# Altium PCB PCB1.PcbDoc (part 3 of 3)
Units mm, origin at the board's own origin, x right, y up, seen from the top; angles counter-clockwise.
Board outline 100.84 x 68.96 mm, 2 copper layers (Top Layer, Bottom Layer); 67 components, 62 nets, 324 pads, 94 vias.
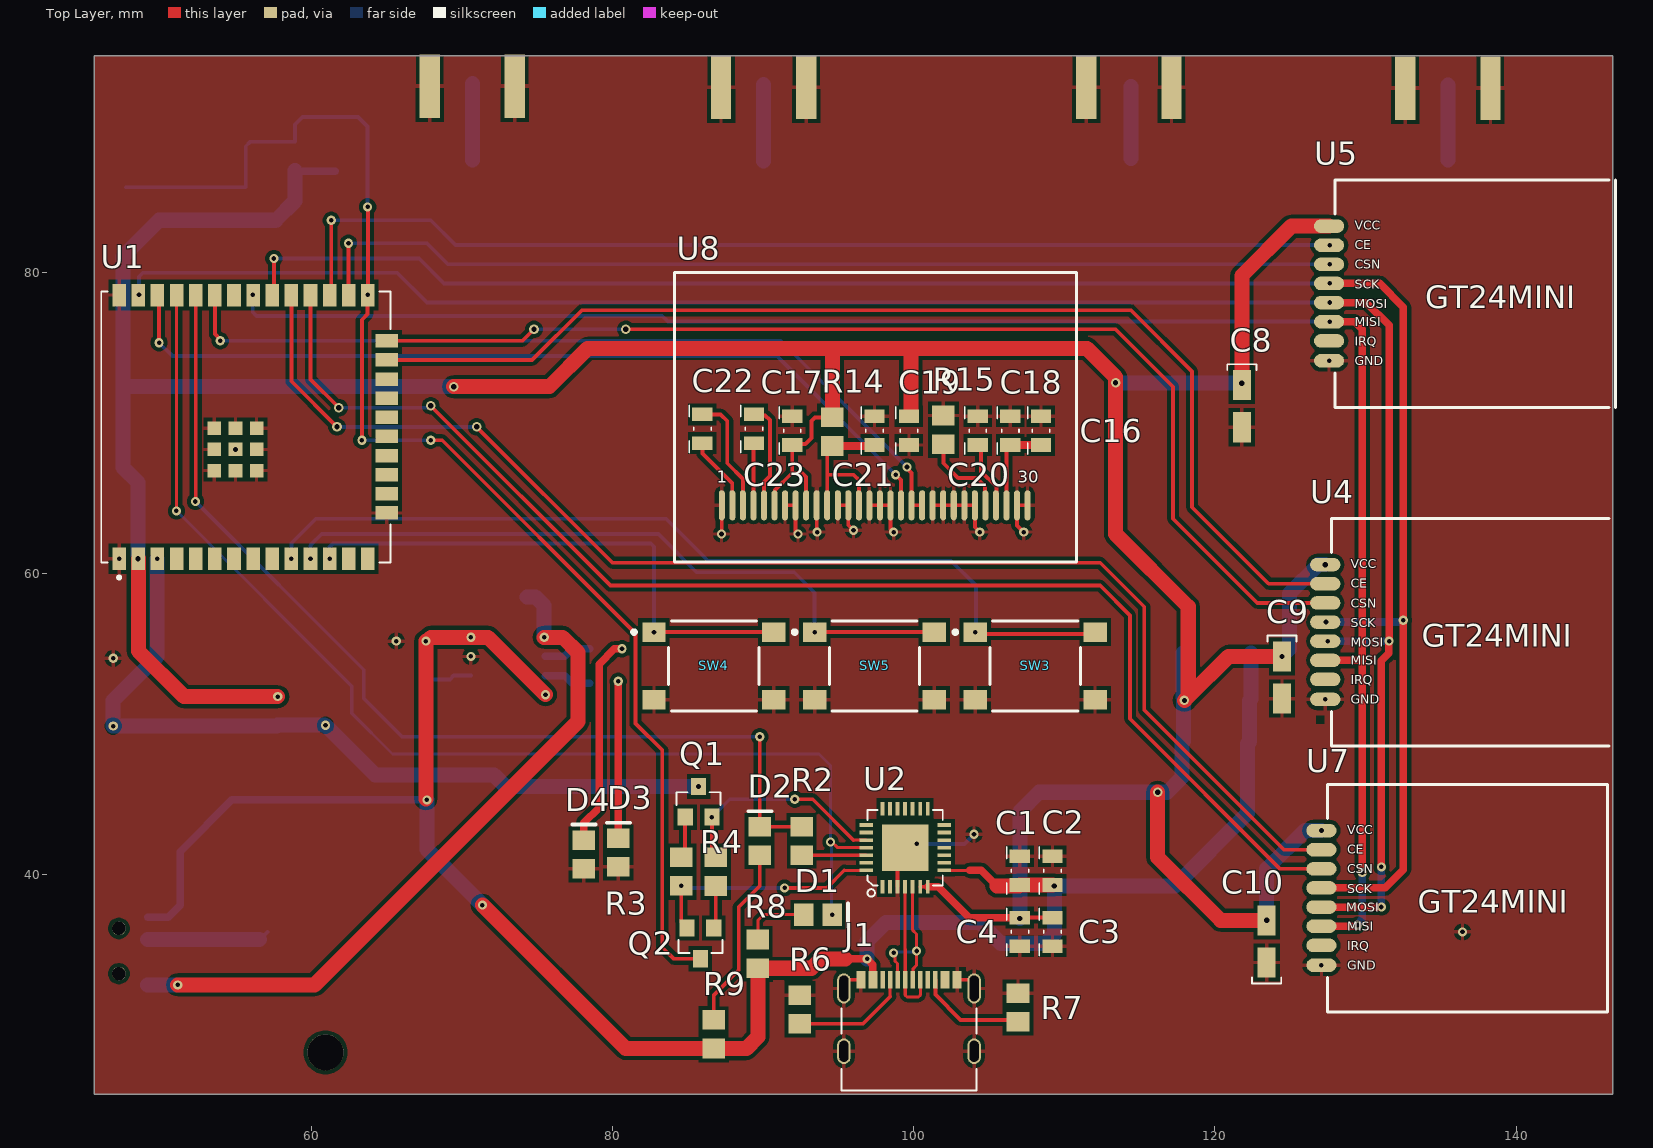
[diagram p0: Top Layer view]

## Via types
v1: diameter 0.61, hole 0.305, Top Layer to Bottom Layer, 76 vias
v2: diameter 0.635, hole 0.354, Top Layer to Bottom Layer, 18 vias

## Nets (pads, with @x,y where several pads share a name; then routed paths per layer and width w, separated by ;. In a path a pad name is that pad's centre, name@x,y a point inside that pad or via, vN(x,y) a via of type N, cw(c..) or ccw(c..) an arc to the next point about the centre after c; other vN are vias at no path point) (continued)
IO18: (continued)
  Bottom Layer w0.254: v1(57.531,80.899) 67.183,80.899 68.834,79.248 v1(127.635,79.248)
  Bottom Layer w0.5: v1(127.381,56.769) 132.371,56.769 132.482,56.88 v1(132.512,56.88)
IO19: U1.31 U4.6 U5.6 U7.6 | length 120
  Top Layer w0.254: U7.6 U7.6@127.082,36.574 ; v1@129.411,36.574 v1(129.476,36.639) ; 129.645,54.224 129.794,54.373
  Top Layer w0.5: U7.6@127.082,36.574 v1@129.411,36.574 ; U4.6 129.645,54.224 ; U5.6 129.291,76.703 129.794,76.2 129.794,54.373 v1(129.794,40.132)
  Bottom Layer w0.254: v1(56.134,78.486) 56.134,77.343 56.388,77.089 83.312,77.089 83.693,76.708 v1(127.635,76.708) ; v1(129.476,36.639) v1@129.476,36.736
  Bottom Layer w0.5: v1@129.476,36.736 129.794,37.053 v1(129.794,40.132)
IO21: U1.33 U8.19 U8.20 | length 55.6
  Top Layer w0.254: U1.33 53.614,75.895 53.975,75.534 v1(53.975,75.438) ; v1(99.568,67.056) 99.568,66.96 99.869,66.659 U8.19 U8.20
  Bottom Layer w0.254: v1(53.975,75.438) 91.186,75.438 v1(99.568,67.056)
IO22: U1.36 U8.18 | length 57.9
  Top Layer w0.254: U1.36 49.911,78.366 v1(49.911,75.311) ; v1(98.806,66.548) 99.169,66.185 U8.18
  Bottom Layer w0.254: v1(49.911,75.311) 50.8,74.422 90.932,74.422 v1(98.806,66.548)
IO23: U1.37 U4.5 U5.5 U7.5 | length 132.7
  Top Layer w0.254: U7.5 U7.5@127.082,37.844 ; v1@131.062,37.844 v1(131.064,37.846)
  Top Layer w0.5: U7.5@127.082,37.844 v1@131.062,37.844 ; U5.5 130.053,77.973 131.572,76.454 v1(131.572,55.499) 131.551,55.478 131.551,54.681 131.064,54.194 v1(131.064,40.513)
  Bottom Layer w0.254: v1(48.579,78.486) 48.579,79.694 48.844,79.959 65.71,79.959 67.691,77.978 v1(127.635,77.978)
  Bottom Layer w0.5: v1(127.508,55.499) v1(131.572,55.499) ; v1(131.064,37.846) v1(131.064,40.513)
IO25: SW3.1 SW3.2 U1.10 | length 60
  Top Layer w0.254: SW3.1@104.737,55.971 SW3.2@112.687,55.971
  Bottom Layer w0.254: v1(58.694,60.973) 58.694,61.996 60.325,63.627 83.566,63.627 86.36,60.833 102.489,60.833 104.14,59.182 104.14,56.136 v1(104.102,56.098)
IO26: SW5.1 SW5.2 U1.11 | length 46.9
  Top Layer w0.254: v1(93.434,56.098) SW5.2
  Bottom Layer w0.254: v1(59.964,60.973) 59.964,61.869 60.706,62.611 83.058,62.611 85.598,60.071 92.075,60.071 93.434,58.712 v1(93.434,56.098)
IO27: SW4.1 SW4.2 U1.12 | length 36.1
  Top Layer w0.254: v1(82.766,56.098) SW4.2
  Bottom Layer w0.254: v1(61.234,60.973) 61.234,61.742 61.468,61.976 82.55,61.976 82.766,61.76 v1(82.766,56.098)
IO32: U1.8
IO33: U1.9
IO34: U1.6
IO35: U1.7
NetANT1_1: ANT1.1 J3.1 | length 5
  Bottom Layer w0.254: ANT1.1@135.478,87.447 ANT1.1
  Bottom Layer w1: ANT1.1@135.478,87.447 J3.1
NetANT2_1: ANT2.1 J4.1 | length 5
  Bottom Layer w0.254: J4.1 J4.1@114.429,92.327
  Bottom Layer w1: ANT2.1 J4.1@114.429,92.327
NetANT3_1: ANT3.1 J5.1 | length 5.2
  Bottom Layer w0.254: ANT3.1@90.043,87.376 ANT3.1
  Bottom Layer w1: ANT3.1@90.043,87.376 J5.1
NetANT4_1: ANT4.1 J6.1 | length 5.1
  Bottom Layer w0.254: ANT4.1@70.708,87.447 ANT4.1
  Bottom Layer w1: ANT4.1@70.708,87.447 J6.1
NetBT1_P: BT1.P SW8.2 | length 8.2
  Bottom Layer w0.254: BT1.P@56.584,35.675 BT1.P
  Bottom Layer w1: SW8.2 BT1.P@56.584,35.675
NetC16_2: C16.2 C18.2 U8.28 | length 6.1
  Top Layer w0.254: U8.28 106.169,68.262 C18.2
  Top Layer w0.5: C18.2 C16.2
NetC20_1: C20.1 U8.27 | length 4.5
  Top Layer w0.254: C20.1 104.481,68.305 104.481,66.762 105.497,65.746 105.497,64.544 U8.27
NetC21_1: C21.1 R14.2 U8.11 U8.14 | length 10.8
  Top Layer w0.254: U8.11 94.269,66.548 ; R14.2 94.269,68.107 94.269,66.548 ; U8.14 96.369,66.191 96.012,66.548 94.269,66.548 ; C21.1@97.343,68.453 C21.1
  Top Layer w0.5: R14.2 C21.1@97.343,68.453
NetC22_1: C22.1 U8.2 | length 5
  Top Layer w0.254: C22.1 85.979,67.945 87.969,65.955 U8.2
NetC22_2: C22.2 U8.3 | length 7.9
  Top Layer w0.254: C22.2 87.188,70.546 87.63,70.104 87.63,67.31 88.669,66.271 U8.3
NetC23_1: C23.1 U8.4 | length 4.1
  Top Layer w0.254: U8.4 89.369,68.607 C23.1
NetC23_2: C23.2 U8.5 | length 7
  Top Layer w0.254: C23.2 89.469,70.485 90.148,70.485 90.464,70.169 90.464,66.461 90.069,66.066 U8.5
NetD1_A: D1.A R8.2 | length 4.5
  Top Layer w0.2: R8.2 89.662,36.957 90.043,37.338 D1.A
NetD2_A: D2.A R9.2 | length 12.2
  Top Layer w0.254: R9.2 86.741,32.004 88.392,33.655 88.392,37.846 89.789,39.243 D2.A
NetD3_k: D3.K R11.1 | length 10.3
  Top Layer w0.254: D3.K@80.391,42.794 D3.K@80.581,42.603
  Top Layer w0.5: D3.K@80.391,42.794 80.391,51.054 v1(80.391,52.832)
NetD4_k: D4.K R10.2 | length 14.1
  Top Layer w0.5: D4.K 78.105,43.434 79.121,44.45 79.121,49.042 79.121,53.975 80.137,54.991 v1(80.645,54.991)
NetQ1_1: Q1.1 R3.2 | length 2.8
  Top Layer w0.254: R3.2 84.836,41.402 Q1.1
NetQ2_1: Q2.1 R4.1 | length 2.8
  Top Layer w0.254: Q2.1 86.868,36.576 R4.1
NetR2_1: R2.1 U2.26 | length 4.3
  Top Layer w0.2: R2.1@92.586,41.283 U2.26
  Top Layer w0.254: R2.1 R2.1@92.586,41.283
NetR10_1: R10.1 U3.6 | length 3.1
  Bottom Layer w0.5: U3.6 76.835,54.483 77.343,54.991 R10.1
NetR11_2: R11.2 U3.7 | length 3.1
  Bottom Layer w0.5: U3.7 76.835,53.213 77.343,52.705 R11.2
NetR13_2: R13.2 U3.2 | length 3
  Bottom Layer w0.254: R13.2 69.215,52.959 69.469,53.213 U3.2
NetR15_1: R15.1 U8.26 | length 5.9
  Top Layer w0.254: R15.1 101.981,67.31 102.962,66.329 104.196,66.329 104.741,65.783 104.741,64.544 U8.26
RESET: C6.2 Q1.3 R1.1 SW1.1 SW1.2 U1.3 | length 53.4
  Bottom Layer w0.254: v1(46.863,49.856) SW1.1@46.988,49.856 ; 47.197,51.896 47.197,52.021 ; R1.1@57.725,49.856 R1.1 ; v1(60.96,49.911) C6.2@61.217,49.654
  Bottom Layer w1: v1(49.784,60.96) 49.784,54.483 47.197,51.896 46.863,51.562 v1(46.863,49.856) SW1.2 R1.1@57.725,49.856 ; R1.1 C6.2@60.899,49.916 ; v1(60.96,49.911) 64.262,46.609 72.146,46.609 72.908,45.847 v1(85.725,45.847)
RI: U2.2
RTS: Q1.2 R4.2 U2.24 | length 14.6
  Top Layer w0.2: 96.02,42.283 U2.24
  Top Layer w0.254: v1(86.614,43.815) 86.614,41.397 R4.2 ; v1(92.117,45) 93.303,45 96.02,42.283
  Bottom Layer w0.254: v1(86.614,43.815) 87.799,45 v1(92.117,45)
RX_0: D2.K R2.2 U1.34 | length 67.5
  Top Layer w0.254: v1(52.324,64.77) 52.344,64.79 U1.34 ; v1(89.789,49.149) D2.K R2.2
  Bottom Layer w0.254: v1(52.324,64.77) 63.5,53.594 63.5,51.689 66.04,49.149 v1(89.789,49.149)
TX_0: D1.K U1.35 U2.25 | length 78.3
  Top Layer w0.2: v1@51.054,64.135 v1(51.064,64.145) 51.074,64.155 U1.35 ; v1(94.488,42.164) 94.581,42.164 94.962,41.783 U2.25
  Bottom Layer w0.2: v1(51.064,64.145) 62.703,52.506 62.703,50.708 65.405,48.006 93.726,48.006 94.488,47.244 v1(94.488,42.164) 94.549,42.103 94.549,37.399 v1(94.61,37.338)
pads on no net: BT1. J1.A8 J1.B4_A9 J1.B8 SW8. SW8.EP U1.4 U1.5 U1.17 U1.18 U1.19 U1.20 U1.21 U1.22 U1.32 U1.40_1 U1.40_2 U1.40_3 U1.40_4 U1.40_5 U1.40_6 U1.40_7 U1.40_8 U1.40_9 U1.40_10 U1.40_11 U1.40_12 U2.9 U2.10 U2.11 U2.12 U2.13 U2.14 U2.15 U2.16 U2.17 U2.18 U2.19 U2.20 U2.21 U2.22 U3.1 U3.9 U4.7 U5.7 U7.7

## Polygon pours and split planes (outlines as drawn)
GND on Top Layer "GND_L01_P001" (solid, pour order 1): 146.431,94.361 146.431,25.4 45.593,25.4 45.593,94.361
GND on Bottom Layer "GND_L02_P000" (solid, pour order 0): 45.593,25.4 45.593,94.361 45.72,94.361 146.431,94.361 146.431,25.4

## Other copper
Top Layer:

## Text inside footprints (layer, text, board x,y; h text height)
J1: Mechanical 13 "PCB EDGE" at 104.899,26.37 h0.61
J3: Mechanical 13 "PCB EDGE" at 139.782,94.104 h0.61 r180
J4: Mechanical 13 "PCB EDGE" at 118.604,94.158 h0.61 r180
J5: Mechanical 13 "PCB EDGE" at 94.347,94.158 h0.61 r180
J6: Mechanical 13 "PCB EDGE" at 75.012,94.231 h0.61 r180
U4: Top Overlay "GT24MINI" at 133.733,55.134 h1.5; Top Overlay "GND" at 129.033,51.329 h0.6; Top Overlay "IRQ" at 129.033,52.629 h0.6; Top Overlay "MISI" at 129.033,53.929 h0.6; Top Overlay "MOSI" at 129.033,55.129 h0.6; Top Overlay "SCK" at 129.033,56.429 h0.6; Top Overlay "CSN" at 129.033,57.729 h0.6; Top Overlay "CE" at 129.033,59.029 h0.6; Top Overlay "VCC" at 129.033,60.329 h0.6
U5: Top Overlay "GT24MINI" at 133.987,77.613 h1.5; Top Overlay "GND" at 129.287,73.808 h0.6; Top Overlay "IRQ" at 129.287,75.108 h0.6; Top Overlay "MISI" at 129.287,76.408 h0.6; Top Overlay "MOSI" at 129.287,77.608 h0.6; Top Overlay "SCK" at 129.287,78.908 h0.6; Top Overlay "CSN" at 129.287,80.208 h0.6; Top Overlay "CE" at 129.287,81.508 h0.6; Top Overlay "VCC" at 129.287,82.808 h0.6
U7: Top Overlay "GT24MINI" at 133.479,37.481 h1.5; Top Overlay "GND" at 128.779,33.676 h0.6; Top Overlay "IRQ" at 128.779,34.976 h0.6; Top Overlay "MISI" at 128.779,36.276 h0.6; Top Overlay "MOSI" at 128.722,37.533 h0.6; Top Overlay "SCK" at 128.779,38.776 h0.6; Top Overlay "CSN" at 128.779,40.076 h0.6; Top Overlay "CE" at 128.779,41.376 h0.6; Top Overlay "VCC" at 128.779,42.676 h0.6
U8: Top Overlay "30" at 106.919,66.016 h0.8; Top Overlay "1" at 86.919,66.016 h0.8